# Altium PCB 2015PCB新.PcbDoc
Units mil, origin at the board's own origin, x right, y up, seen from the top; angles counter-clockwise.
Board outline 3610.89 x 3006.48 mil, 2 copper layers (Top Layer, Bottom Layer); 75 components, 41 nets, 243 pads, 76 vias.
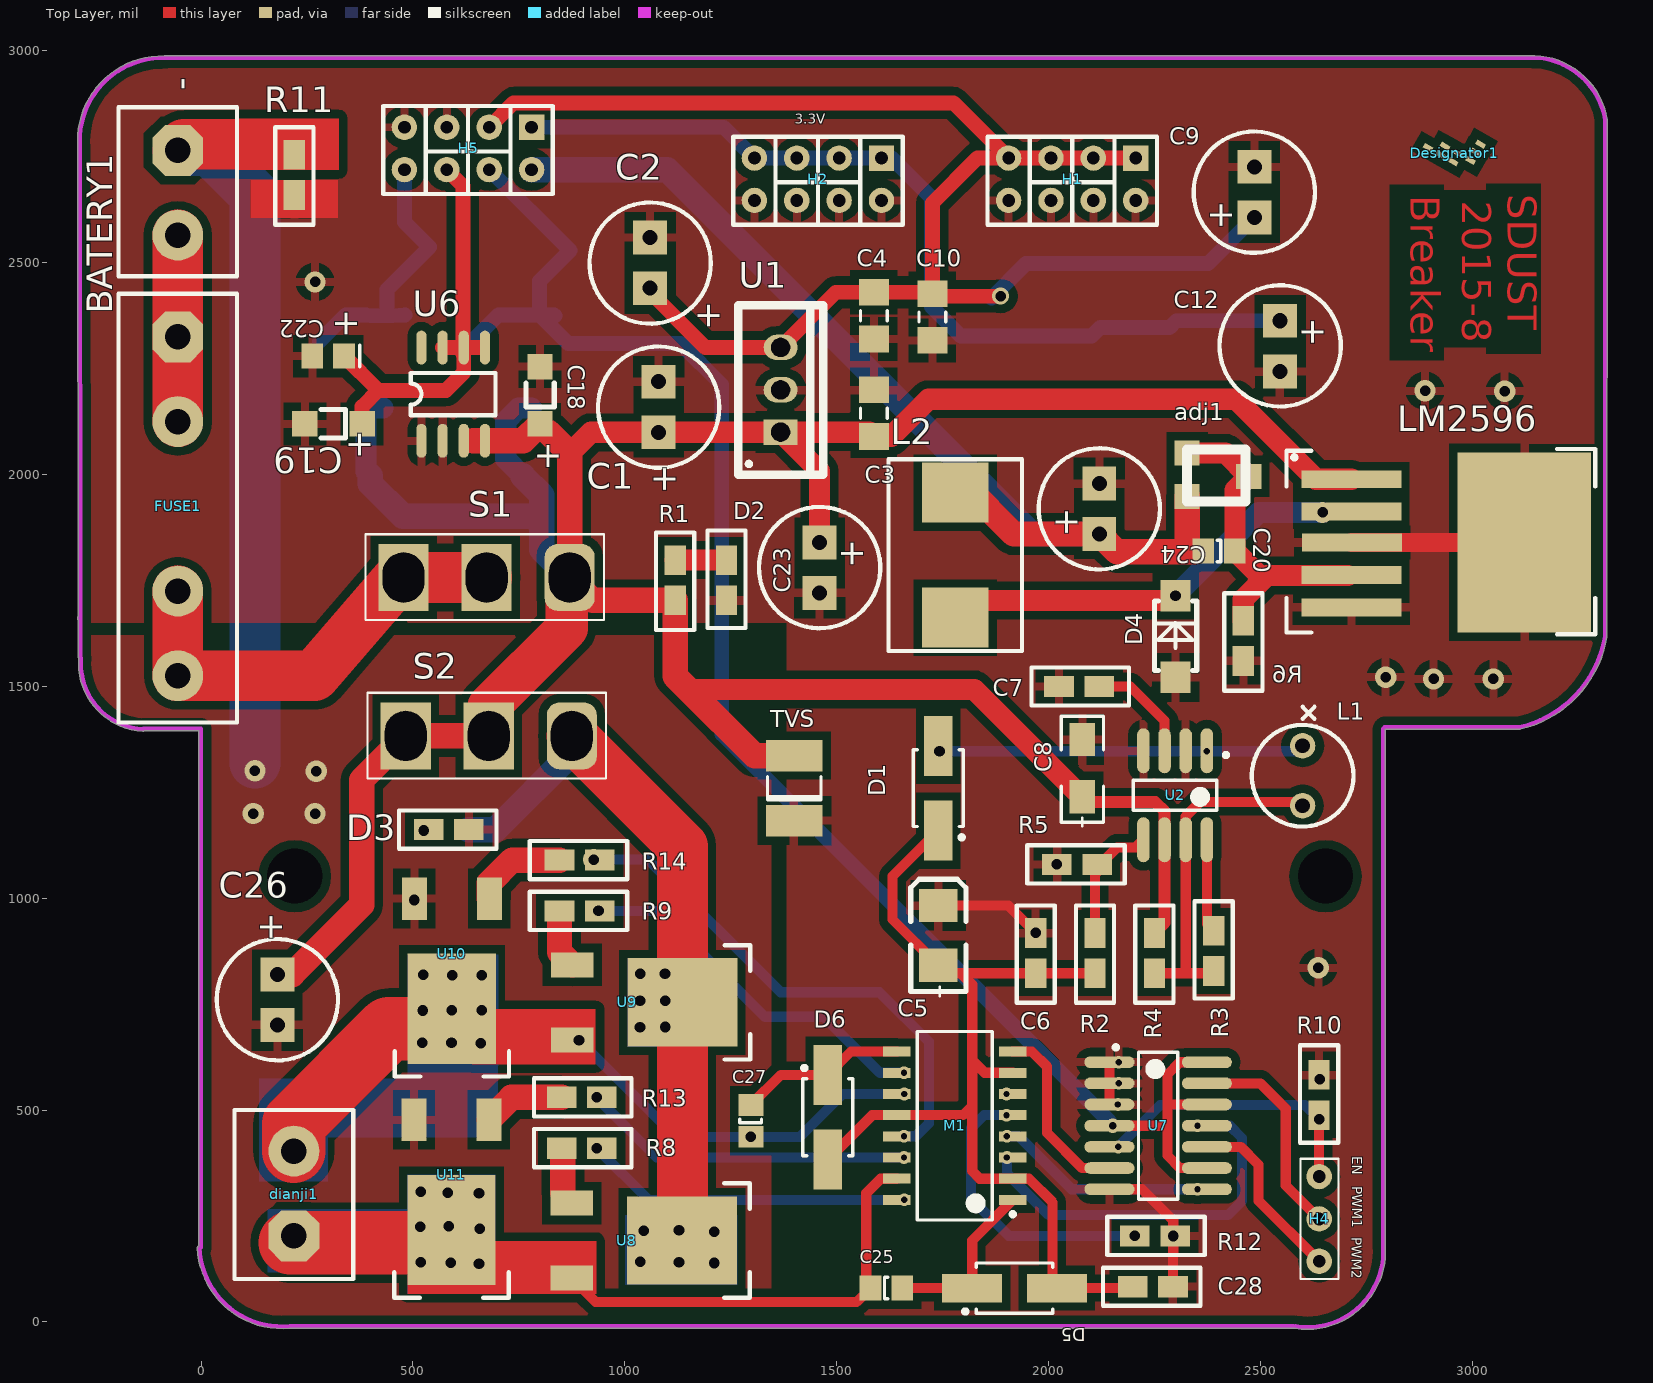
[diagram p0: Top Layer view]
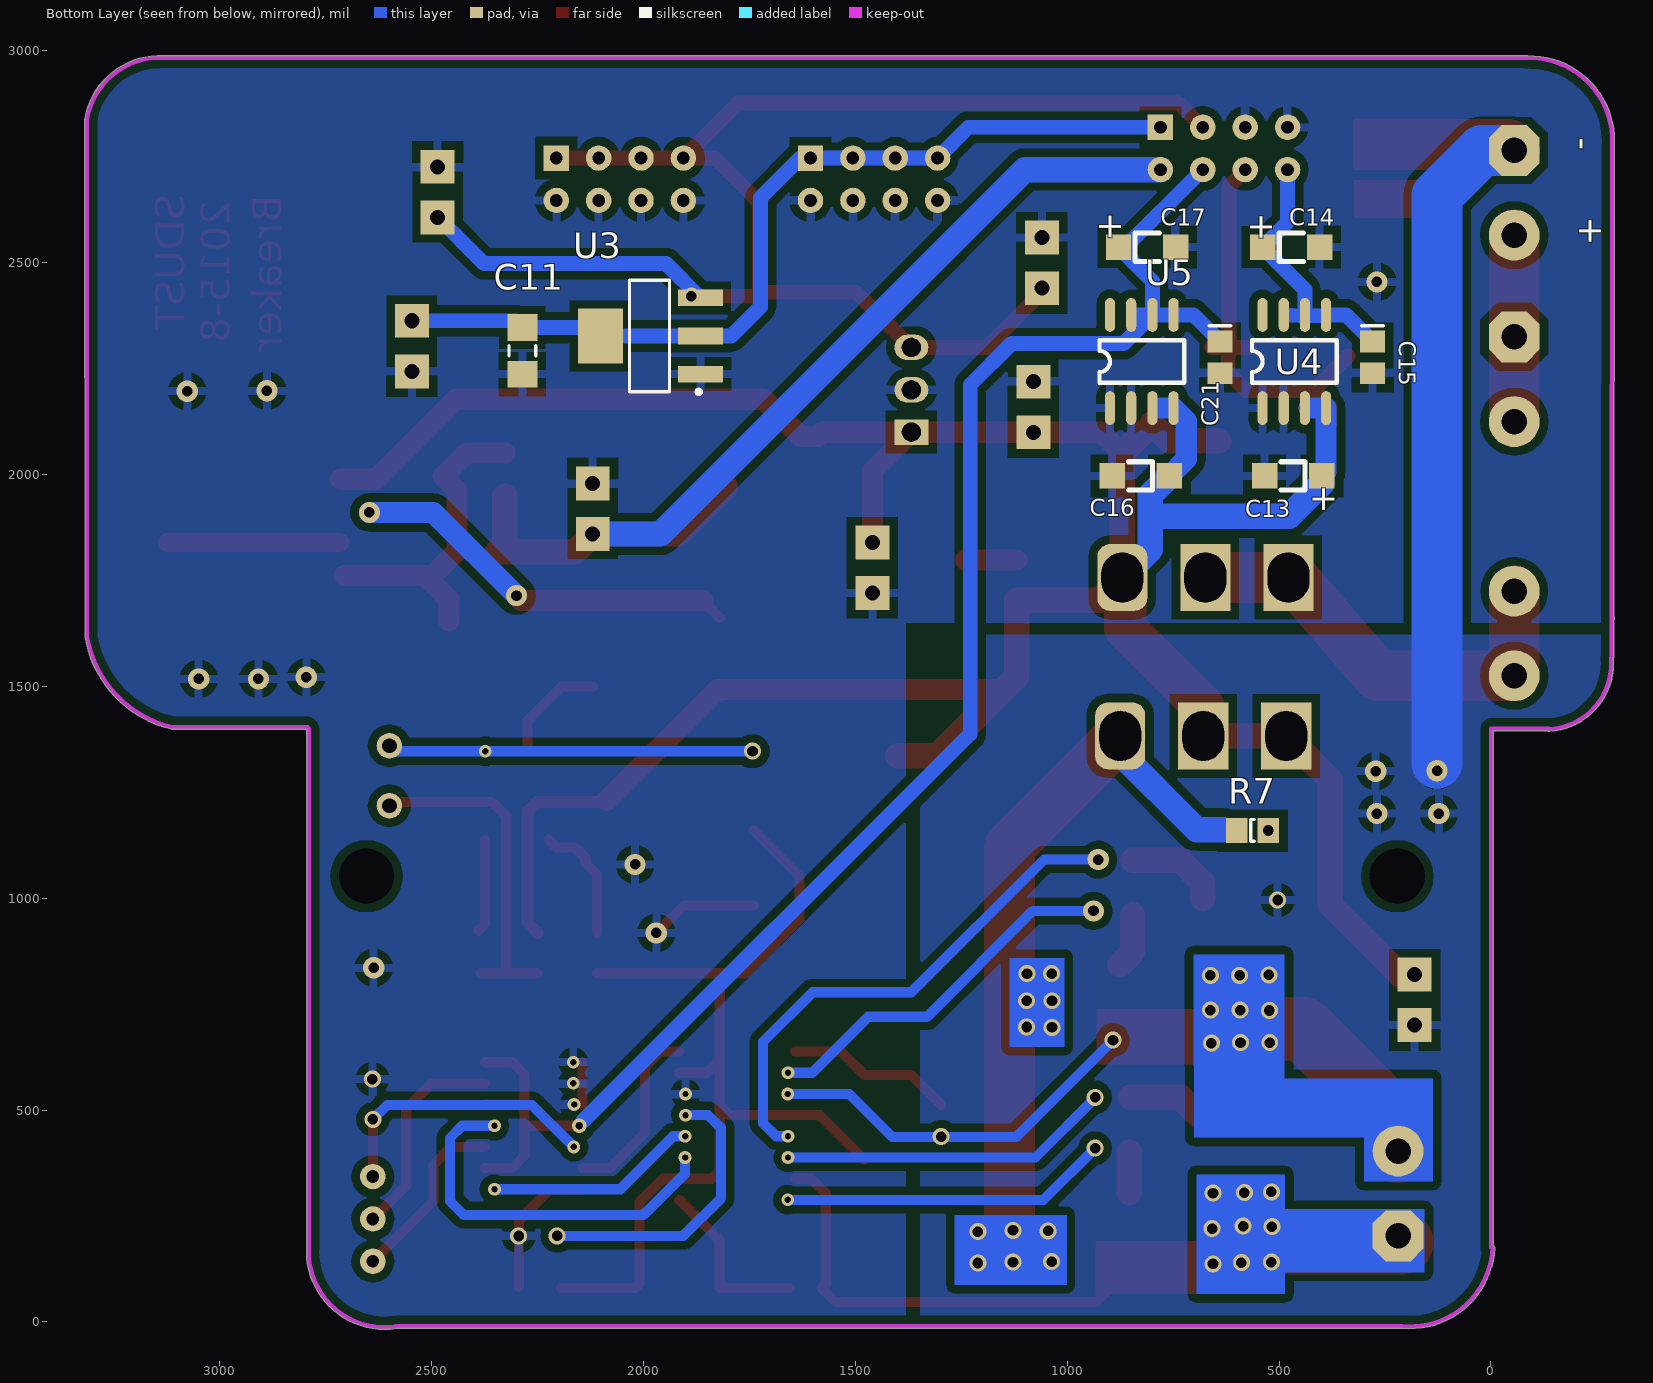
[diagram p1: Bottom Layer view, seen from below]

## Layer stack, top to bottom
Top Layer: signal copper 1.4
Dielectric: dielectric 12.6, FR-4, Dk 4.8
Bottom Layer: signal copper 1.4

## Board outline
-8.61,175.51 cw(c-3.6,175.7) -5.02,180.51 -5.02,1395.26 -134.79,1395.26 cw(c-137.63,1399.39) -137.91,1394.38 cw(c-129.04,1554.08) -288.54,1565.98 cw(c-284.67,1569.17) -289.69,1569.17 -289.69,1657.2 -290.22,1657.73 cw(c-286.67,1661.27) -289.69,1665.28 -290.68,2770.44 cw(c-91.06,2788.05) -86.84,2988.41 cw(c-84,2984.27) -84,2989.29 3132.9,2989.29 cw(c3140.03,2807.55) 3319.14,2839.16 cw(c3314.2,2838.28) 3319.22,2838.28 cw(c3314.2,2838.28) 3319.22,2838.19 3319.22,2838.28 3319.22,2838.19 3318.41,1617.91 cw(c3313.39,1617.85) 3318.41,1617.85 cw(c3313.39,1617.85) 3318.34,1617.01 cw(c3051.9,1662.28) 3112.12,1398.81 cw(c3111,1403.7) 3111,1398.69 2795.01,1398.69 2795.01,180.46 cw(c2611.54,166.79) 2795.52,166.79 cw(c2611.54,166.79) 2582.85,-14.94 cw(c2583.63,-9.99) 2580.87,-14.18 cw(c2579.08,-9.49) 2579.08,-14.51 209.73,-14.51 cw(c190,183.27)

## Design rules (kind name [scope] priority, off if disabled: settings)
Clearance Clearance_1 [InPoly] p1: gap=20
Clearance [All] p2: gap=10
ComponentClearance [All] p1: gap=8 collisioncheckmode=3 verticalgap=8 showdistances=FALSE
HoleSize [All] p1: absolutevalues=TRUE maxlimit=200 minlimit=0 maxpercent=80.000 minpercent=20.000
MinimumSolderMaskSliver [All] p1: minsoldermaskwidth=1
PolygonConnect [All] p1: connectstyle=Relief reliefconductorwidth=20 reliefentries=4 polygonreliefangle="90 Angle"
RoutingVias [All] p1: holewidth=25 width=40 viastyle="Through Hole" minholewidth=15 minwidth=25 maxholewidth=25 maxwidth=50
SilkToSilkClearance [All] p1: silktosilkclearance=0
SilkscreenOverComponentPads [All] p1: minsilkscreentomaskgap=0
SolderMaskExpansion [All] p1: expansion=4
TestPointUsage [All] p1: valid=0 allowmultiple=FALSE
Testpoint [All] p1: side=15 testpointundercomponent=TRUE minsize=40 maxsize=100 preferedsize=60 minholesize=0 maxholesize=40 preferedholesize=32 testpointgrid=1 style=1023 order=0123456789
Width [All] p1: maxlimit=1000 minlimit=8 preferedwidth=24
19 further rules are at their usual default settings.

## Components (designator, comment, footprint, x,y, rotation, side; value= is the part's Value field where it differs from the comment)
adj1 "RISISTR_ADJ" RISIATER_ADJ 2400,2000 r270 top
BATERY1 "7.2V电池" PCBComponent_1#1 -55,2765.27 r0 top
C1 "Cap Pol1_1" PCBComponent_1#2 1080,2100 r180 top
C2 "Cap Pol1_1" PCBComponent_1#2 1060,2440 r180 top
C3 "Cap" PCBComponent_1#3 1588,2200.27 r0 top
C4 "Cap" PCBComponent_1#3 1588,2320.27 r180 top
C5 "22uF_3528" 3528_B 1740,840 r90 top
C6 "0.1uF" 0805#1 1970,823.27 r90 top
C7 "470pF" 0805#1 2120,1500 r180 top
C8 "10uf" 1206#1 2080,1240 r90 top
C9 "Cap Pol1_1" PCBComponent_1#2 2486,2607.27 r180 top
C10 "Cap" PCBComponent_1#3 1726,2427.27 r0 top
C11 "Cap" PCBComponent_1#3 2286,2347.27 r180 bottom
C12 "Cap Pol1_1" PCBComponent_1#2 2547,2363.27 r0 top
C13 "10uF" 1206#2 399,1997 r0 bottom
C14 "10uF" 1206#2 539,2537 r180 bottom
C15 "104" c0805 279,2277 r270 bottom
C16 "10uF" 1206#2 759,1997 r0 bottom
C17 "10uF" 1206#2 879,2537 r180 bottom
C18 "10uF" 1206#2 800,2120 r90 top
C19 "10uF" 1206#2 380,2120 r180 top
C20 "104" 0805#2 2440,1820 r180 top
C21 "104" c0805 639,2277 r270 bottom
C22 "104" c0805 300,2280 r180 top
C23 "Cap Pol1_1" PCBComponent_1#2 1460,1840 r0 top (schematic designator C12)
C24 "Cap Pol1_1" PCBComponent_1#2 2120,1860 r180 top (schematic designator C12)
C25 "4.7uF" 0805#2 1580,80 r0 top
C26 "Cap Pol1_1" PCBComponent_1#2 180,820 r0 top
C27 "4.7uF" 0805#2 1297.69,437.58 r90 top
C28 "0.1uF" 0805#1 2199,83.27 r0 top
D1 "1N5819" SS14_SMA 1740,1260 r270 top
D2 "LED_0805" 0805#1 1240,1798.27 r270 top
D3 "LED_0805" 0805#1 537,1162.27 r0 top
D4 "1N5819" 1N5819 2300,1620 r0 top
D5 "1N5819" SS14_SMA 1920,80 r180 top
D6 "1N5819" SS14_SMA 1479,483.27 r90 top
Designator1 "Comment" FREESCALE 3020,2780 r270 top
dianji1 "dianji" PCBComponent_1#1 219,203.27 r180 top
FUSE1 "Header 2X2" PCBComponent_1#4 -55,2325.27 r0 top
H1 "HEADER4X2" HEADER4X2 2206,2747.27 r180 top
H2 "HEADER4X2" HEADER4X2 1606,2747.27 r180 top
H4 "HEADER" 干簧管 2639,143.27 r90 top
H5 "HEADER4X2" HEADER4X2 780,2820 r180 top (schematic designator H2)
L1 "Inductor" PCBComponent_1#5 2600,1360 r270 top
L2 "L?" 7*7*4 1780,1820 r90 top
LM2596 "Comment" LM2596 2920,1840 r0 top
M1 "HIP4082" SO-16 1779,463.27 r90 top
R1 "RES" 0805#1 1119,1703.27 r90 top
R2 "10K" 0805#1 2110,823.27 r90 top
R3 "180" 0805#1 2390,923.27 r270 top
R4 "0.22" 0805#1 2250,823.27 r90 top
R5 "1K" 0805#1 2020,1080 r0 top
R6 "Res2" 0805#1 2460,1560 r90 top
R7 "RES" 0805#2 600,1160 r180 bottom
R8 "10" 0805#1 946,410.27 r180 top
R9 "10" 0805#1 846,970.27 r0 top
R10 "10K" 0805#1 2639,583.27 r270 top
R11 "RES" 0805#1 220,2660 r90 top
R12 "10K" 0805#1 2299,203.27 r180 top
R13 "10" 0805#1 946,530.27 r180 top
R14 "10" 0805#1 846,1090.27 r0 top
S1 "单刀双掷开关" 三脚开关 674,1757.27 r0 top
S2 "单刀双掷开关" 三脚开关 679,1383.27 r0 top
TVS "TVS" 1812 1400,1260 r90 top (schematic designator erjiguan1)
U1 "LM2940" PCBComponent_1#6 1368,2100.27 r0 top
U2 "MC34063_sop" SOP-8 2299,1243.27 r270 top
U3 "AMS1117" SOT223_forAMS1117 1986,2327.27 r0 bottom
U4 "TPS7350" SO-8 539,2157 r90 bottom
U5 "TPS7350" SO-8 899,2157 r90 bottom
U6 "TPS7333" SO-8 520,2080 r90 top
U7 "74HC08D_sop" SOP-14 2259,463.27 r0 top
U8 "LR7843" DPAK 1135,192.27 r270 top
U9 "LR7843" DPAK 1136,754.27 r270 top
U10 "LR7843" DPAK 592,739.27 r180 top
U11 "LR7843" DPAK 591,217.27 r180 top

## Footprints (in the part's own frame and the unit in brackets; to place one, negate y for a bottom-side part, rotate by r counter-clockwise, add the part's x,y. Pads: shape width x height; smd on the part's side, far side on the other; paste and mask are expansions set on the pad)
1N5819 [mm]
  rect 1.8x1.9 smd: 1(0,-2.5) 2(0,2.4)
  silkscreen extent -1.27,-2.09 1.27,2.07
7*7*4 [mm]
  rect 3.6x4 smd: 1(-4,0) 2(3.5,0)
  silkscreen extent -6,-4 5.5,4
0805#1 [mil]
  rect 70x50 smd: 1(0,0) 2(95,0)
  silkscreen extent -70,-45 160,45
0805#2 [mil]
  rect 51.18x59.05 smd: 1(0,0) 2(74.8,0)
  silkscreen extent 33,-25 41,26
1206#1 [mil]
  rect 78.74x60 smd: 1(0,0) 2(135,0)
  silkscreen extent -70,-50 190,50
1206#2 [mil]
  rect 60x60 smd: 1(0,0) 2(135,0)
  silkscreen extent 39,-33 96,33
1812 [mm] "Chip Capacitor; Body 4.5 x 3.2 mm (LxW typ)"
  rect 1.9x3.4 smd: 1(-1.95,0) 2(1.95,0)
  silkscreen extent -0.7,-1.6 0.7,1.6
3528_B [mil]
  rect 78.74x90 smd: 1(2,0) 2(143,0)
  silkscreen extent -71,-65 205,65
c0805 [mm] "Chip Capacitor; Body 2.0 x 1.2 mm (LxW typ)"
  rect 1.3x1.5 smd: 1(-0.95,0) 2(0.95,0)
  silkscreen extent -1.9,-0.65 -1.9,0.65
DPAK [mil]
  rect 59.06x100 smd: 1(-88.5,-260) 3(88.5,-260)
  rect 208.66x260 smd: 2(0,0)
  silkscreen extent -135,100 135,160
FREESCALE [mm]
  rect 0.6x0.3 smd rot 60: 0(0,0) 1(0.475,-0.3) 2(0.975,-0.6) 3(0.55,-1.35) 4(1.05,-1.65) 5(0.125,-2.125) 6(0.625,-2.4) 7(0.2,-3.15)
HEADER4X2 [mil]
  rect 60x60 hole 30: 1(0,0)
  round 60 hole 30: 2(100,0) 3(200,0) 4(300,0) 5(300,100) 6(200,100) 7(100,100) 8(0,100)
  silkscreen extent -50,-50 350,157
LM2596 [mm]
  rect 8x10.8 smd: 0(5.168,0)
  rect 6x1.07 smd: 1(-5.2,3.792) 2(-5.2,1.846) 3(-5.168,0) 4(-5.2,-1.946) 5(-5.2,-3.892)
  silkscreen extent -9.1,-5.5 9.41,5.6, body extent -4.69,-5.21 4.2,5.21, height 4.65
PCBComponent_1#1 [mil]
  oct 120x120 hole 60: 1(0,0)
  round 120 hole 60: 2(0,-200)
  silkscreen extent -140,-297 140,102
PCBComponent_1#2 [mil]
  rect 80x80 hole 35.42: 1(0,0) 2(0,-119.37)
  silkscreen extent -143,-203 143,84
PCBComponent_1#3 [mil]
  rect 70.87x62.99 smd: 1(0,0) 2(0,-110.24)
  silkscreen extent -31,-67 31,-43
PCBComponent_1#4 [mil]
  oct 120x120 hole 60: 1(0,0)
  round 120 hole 60: 2(0,-600) 3(0,-200) 4(0,-800)
  silkscreen extent -140,-910 140,102
PCBComponent_1#5 [mil]
  round 60 hole 35: 1(0,0) 2(141.42,0)
  silkscreen extent -92,-120 191,120
PCBComponent_1#6 [mil]
  rect 80x60 hole 45: 1(0,0)
  oval 80x60 hole 45: 2(0,100) 3(0,200)
  silkscreen extent -100,-100 100,300
RISIATER_ADJ [mm]
  rect 1.5x1.5 smd: 1(-1.3,-1.85) 2(0.1,1.85) 3(1.3,-1.85)
  silkscreen extent -1.5,-1.85 1.6,1.65
SO-8 [mil]
  oval 80x24 smd: 1(0,0) 2(0,-50) 3(0,-100) 4(0,-150) 5(220,-150) 6(220,-100) 7(220,-50) 8(220,0)
  silkscreen extent 60,-175 160,25
SO-16 [mm] "Small Outline; 16 Leads; Body Width 5.6 mm; Pitch 1.27 mm"
  rect 0.6x1.65 smd: 1(-4.445,-3.475) 2(-3.175,-3.475) 3(-1.905,-3.475) 4(-0.635,-3.475) 5(0.635,-3.475) 6(1.905,-3.475) 7(3.175,-3.475) 8(4.445,-3.475) 9(4.445,3.475) 10(3.175,3.475) 11(1.905,3.475) 12(0.635,3.475) 13(-0.635,3.475) 14(-1.905,3.475) 15(-3.175,3.475) 16(-4.445,3.475)
  silkscreen extent -5.65,-3.6 5.65,2.25
SOP-8 [mm] "SOIC, 8-Leads, Body 5.0x4.0mm (max), Pitch 1.27mm, IPC Medium Density"
  oval 2.7x0.75 smd: 1(-2.667,1.905) 2(-2.667,0.635) 3(-2.667,-0.635) 4(-2.667,-1.905) 5(2.667,-1.905) 6(2.667,-0.635) 7(2.667,0.635) 8(2.667,1.905)
  silkscreen extent -2.54,-2.5 0.9,3.17, body extent -2,-2.5 2,2.5, height 1.75
SOP-14 [mm] "SOIC, 14-Leads, Body 8.8x4.0mm (max), Pitch 1.27mm, IPC Medium Density"
  oval 3x0.7 smd: 1(-2.921,3.81) 2(-2.921,2.54) 3(-2.921,1.27) 4(-2.921,0) 5(-2.921,-1.27) 6(-2.921,-2.54) 7(-2.921,-3.81) 8(2.921,-3.81) 9(2.921,-2.54) 10(2.921,-1.27) 11(2.921,0) 12(2.921,1.27) 13(2.921,2.54) 14(2.921,3.81)
  silkscreen extent -2.66,-4.4 1.18,4.82, body extent -2,-4.38 2,4.38, height 1.75
SOT223_forAMS1117 [mm] "SOT223, 4-Leads, Body 6.7x7.3mm (max), Pitch 2.30mm, IPC Low Density"
  rect 2.7x1 smd: 1(-3.048,2.286) 2(-3.048,0) 3(-3.048,-2.286)
  rect 2.7x3.3 smd: 2(2.95,0)
  silkscreen extent -3.07,-3.35 1.2,3.47, body extent -1.85,-3.35 1.85,3.35, height 1.8
SS14_SMA [mm] "Molded Diode, 2-Leads, Body 4.3x2.6mm, IPC Low Density"
  rect 3.6x1.7 smd: 1(-2.54,0) 2(2.54,0)
  silkscreen extent -2.3,-1.5 3.07,1.53, body extent -2.29,-1.5 2.28,1.5, height 2.62
三脚开关 [mm]
  rect 3x4 hole 2.5 slot 3 at 90 deg: 1(-4.978,0) 2(0,0)
  rrect50% 3x4 hole 2.5 slot 3 at 90 deg: 3(4.978,0)
  silkscreen extent -7.26,-2.54 7.04,2.59
干簧管 [mil]
  round 60 hole 30: 1(0,0) 2(100,0) 3(200,0)
  silkscreen extent -42,-46 242,44

## Part data
BATERY1 dianji1: library part "Header 2", "Header, 2-Pin"
C1 C2 C9 C12 C23 C24 C26: "Polarized Capacitor (Radial)"
C3 C4 C10 C11: "Capacitor"
C5: library part 10uF_3528
C6 C7 C25 C27 C28: library part 0.1uF_0805
C8: library part ELECTRO2_2, "Electrolytic Capacitor"
C13 C14 C17 C18 C19 C22: library part "Cap Pol1_1", "Polarized Capacitor (Radial)"
C15 C16 C20 C21: library part Cap, "Capacitor"
D1 D4 D5 D6: library part 1N5819_SMA
FUSE1: "Header, 2-Pin, Dual row"
H4: library part HEADER3
L2: library part 33Uinductor774
R1 R6 R7 R11: library part 0805-电阻
R2 R3 R4 R5 R8 R9 R10 R12 R13 R14: library part RES_0805
S2: library part 三脚开关
TVS: library part Component_1
U5: library part 0512
U6: library part LM2940
U7: library part 74HCT00D_sop
U8 U9 U10 U11: library part IRF3205_D2PAK

## Free pads (board coordinates)
  round 60 hole 129.92: 1(221,1052.27) 2(2654,1052.27)

## Via types
v1: diameter 40, hole 25, Top Layer to Bottom Layer, 42 vias
v2: diameter 50, hole 25, Top Layer to Bottom Layer, 17 vias
v3: diameter 30, hole 15, Top Layer to Bottom Layer, 16 vias
v4: diameter 35, hole 18, Top Layer to Bottom Layer, 1 vias

## Nets (pads, with @x,y where several pads share a name; then routed paths per layer and width w, separated by ;. In a path a pad name is that pad's centre, name@x,y a point inside that pad or via, vN(x,y) a via of type N, cw(c..) or ccw(c..) an arc to the next point about the centre after c; other vN are vias at no path point)
3.3V: C11.1 C12.1 H2.1 H2.2 H2.3 H2.4 H5.1 U3.2 | length 2170.6
  Bottom Layer w35: H5.1 1233.27,2820 H2.4 H2.3 H2.2 H2.1 1630,2747.27 1724,2653.27 1724,2396.27 1793,2327.27 U3.2@1866,2327.27 ; U3.2@1832,2327.27 U3.2@1866,2327.27 ; C12.1 2302,2363.27 C11.1 2122.14,2347.27 2102.14,2327.27 U3.2@1866,2327.27
3.3V(D): C19.1 C22.1 H5.6 U6.5 U6.6 U6.7 | length 1044.2
  Top Layer w35: C22.1 418.4,2199 ; C19.1 380,2160.6 418.4,2199 ; U6.7 U6.6@618,2300 ; H5.6@590,2710 H5.6 618,2682 618,2302 U6.6 ; U6.6@618,2284 U6.6@618,2300 ; U6.5@660,2300 U6.6 ; 418.4,2199 578,2199 620,2241 U6.6 ; U6.6@618,2300 U6.6
5V(3): C2.1 C4.2 C9.1 C10.1 H1.1 H1.2 H1.3 H1.4 H5.2 U1.3 U3.3 | length 3692.6
  Top Layer w35: H5.2 737.5,2877.5 1775.77,2877.5 H1.4 ; C2.1@1047,2443.27 1190,2300.27 U1.3 1498.24,2430.51 C4.2 C10.1@1722.76,2430.51 ; v1(1887,2421.27) 1732,2421.27 C10.1 1726,2641 1832.27,2747.27 H1.4 ; H1.1 H1.2 H1.3 H1.4
  Bottom Layer w35: U3.3 1947,2498.27 2377,2498.27 C9.1
5V(B): C17.1 C21.1 H5.7 U5.5 U5.6 U5.7 U7.4 U7.9 U7.12 U7.14 | length 3903.7
  Top Layer w24: v4(2152,463.27) 2281,463.27 ; 2282.73,513.27 U7.12 ; U7.9 2310.73,363.27 2281,393 2281,463.27 ; U7.14 2310,613.27 2281,584.27 2281,463.27
  Bottom Layer w35: C21.1 701.6,2377 U5.5@740,2377 ; H5.7 871,2529 799,2457 U5.6 ; U5.5 U5.6 ; 835,2375 833,2377 U5.6 ; v4@2144,473.17 1229,1388.17 1229,2212 1131.5,2309.5 866.5,2309.5 U5.6
5V(S): C14.1 C15.1 H5.5 U4.5 U4.6 U4.7 | length 680
  Bottom Layer w35: C15.1 341.6,2377 U4.5 ; 401,2375 451,2375 U4.7@481,2377 ; U4.6 439,2437 C14.1 ; H5.5 480,2596 C14.1 ; 500,2576 C14.1
7.2V: C1.1 C3.2 C8.1 C13.1 C16.1 C18.1 C23.1 C26.1 LM2596.1 R1.1 R4.2 S1.3 S2.1 S2.2 TVS.2 U1.1 U2.6 U4.3 U4.4 U5.3 U5.4 U6.3 U6.4 | length 7678.8
  Top Layer w28: C8.1@2086.77,1231.23 2093,1227 2252.27,1227 2274,1205.27 U2.6 2274,942.27 R4.2
  Top Layer w35: C3.2@1577.76,2100.27 C3.2
  Top Layer w50: C18.1 C18.1@820,2100 ; 870,2050 920,2100 C1.1 ; C1.1@1068,2100.27 U1.1 ; 1150.82,1492.41 1151.4,1493 1825,1493 C8.1@2086.77,1231.23 ; C23.1 1460,2008.27 U1.1 ; C3.2@1577.76,2100.27 U1.1 ; C3.2 1629.04,2090.04 1717,2178 2443,2178 2631.71,1989.29 LM2596.1
  Top Layer w60: C26.1 214.73,820 379,984.27 379,1279.27 S2.1 S2.2 ; 642,2080 U6.4 ; 686,2080 760,2080 C18.1 ; C18.1@820,2100 870,2050 S1.3 ; S1.3@898,1729.27 924,1703.27 R1.1@1111,1703.27 ; R1.1 1119,1524.23 1150.82,1492.41 1306.46,1336.77 TVS.2
  Top Layer w100: S2.2 679,1453.27 863,1637.27 S1.3@863,1762
  Bottom Layer w50: C13.1 389,2007 389,2103 U4.4 U4.3@429,2157 ; C16.1 719,2037 719,2127 U5.4 779.63,2157
  Bottom Layer w60: C13.1 399,1979 475.91,1902.09 783.91,1902.09 804,1882 ; C16.1 804,1952 804,1882 ; S1.3 804,1823.27 804,1882
12V: C5.1 C6.1 C28.1 D1.2 D5.1 D6.1 M1.2 M1.7 M1.12 R2.1 | length 2361.9
  Top Layer w24: D6.1 1584,488.27 M1.12 1798.27,488.27 1820,510 ; D1.2 1632,1052 1632,950 C5.1 1758.73,823.27 1792.73,823.27 ; 1820,356.27 1838,338.27 M1.2 1954,338.27 2009.96,282.31 2009.96,90.04 D5.1 C28.1@2195.73,80 ; 1820,362.27 1820,510 ; M1.7 1849.73,588.27 1820,618 ; R2.1 C6.1 1792.73,823.27 ; 1792.73,823.27 1820,796 1820,618 ; 1820,510 1820,618
ADJ: adj1.3 C20.2 C24.1 H5.8 L2.2 | length 2427.4
  Top Layer w60: L2.2@1807.15,1970.64 1917.8,1860 C24.1 2162.11,1817.89 2327.17,1817.89 ; adj1.3 2327.17,1817.89 ; C20.2@2344.09,1817.89 2327.17,1817.89
  Bottom Layer w60: H5.8 1100,2720 1960,1860 C24.1
EN: H4.3 R10.2 U7.5 | length 674.1
  Top Layer w24: H4.3 R10.2
  Bottom Layer w24: v3(2165,413.27) 2264,512.27 2605,512.27 v1(2639,478.27)
ENABLE: M1.8 U7.6 | length 433.5
  Top Layer w24: M1.8 1961,638.27 1997,602.27 1997,446.27 2080,363.27 U7.6
GND: C1.2 C2.2 C3.1 C4.1 C5.2 C6.2 C7.2 C8.2 C9.2 C10.2 C11.2 C12.2 C13.2 C14.2 C15.2 C16.2 C17.2 C18.2 C19.2 C21.2 C22.2 C23.2 C24.2 C28.2 D2.2 D4.1 H1.5 H1.6 H1.7 H1.8 H2.5 H2.6 H2.7 H2.8 H5.3 H5.4 LM2596.0 LM2596.3 LM2596.5 M1.6 R5.1 R6.1 R10.1 R11.1 R12.1 TVS.1 U1.2 U2.2 U2.4 U3.1 U4.1 U4.2 U5.1 U5.2 U6.1 U6.2 U7.1 U7.2 U7.3 U7.7 | length 1100.9
  Top Layer w24: C5.2 1905.27,983 v2(1970,918.27) ; U7.7 2220.9,313.27 2294,240.17 2294,198.27 C28.2 ; U7.3 U7.2 U7.1
  Top Layer w45: LM2596.3 LM2596.0
  other v1: 2295,203 2640,573.27
  other v2: 2637,836 2020,1080 2909,1518 3050,1518 2796,1522 3077,2197 2889,2198 269,2455
  other v3: 2164,513.27 1901,538.27 2166,563.27 2166,613.27
Netadj1_1: adj1.1 adj1.2 C20.1 LM2596.4 R6.2 | length 773.7
  Top Layer w50: adj1.1 2417.71,2051.18 adj1.2 2440,1963.23 C20.1 2506.61,1753.39 ; R6.2 2460,1706.77 2515.23,1762 LM2596.4@2706.66,1762
NetBATERY1_2: BATERY1.2 FUSE1.1 FUSE1.3 | length 440
  Top Layer w120: FUSE1.3 FUSE1.1 BATERY1.2
NetC7_1: C7.1 U2.3 | length 258.3
  Top Layer w24: C7.1 2193,1500 2274,1419 U2.3
NetC25_1: C25.1 dianji1.1 M1.15 U8.3 U11.2 | length 1448.9
  Top Layer w24: U8.3 931.5,47.27 1547.27,47.27 C25.1 1570,90 1570,304 1604.27,338.27 M1.15
  Top Layer w100: U11.2@561,187.27 U11.2
  Top Layer w150: dianji1.1@211,187.27 U11.2@561,187.27
  other v1: 656,137.27 589,140.27 518,141.27 658,220.27 517,225.27 585,226.27 656,304.27 582,305.27 518,307.27
NetC25_2: C25.2 D5.2 M1.1 | length 413.2
  Top Layer w24: C25.2 D5.2 1820,192.46 M1.1
NetC27_1: C27.1 dianji1.2 M1.11 U9.3 U10.2 | length 1769.8
  Top Layer w24: U10.2@545,692.27 U10.2 U10.2@665.5,665.77
  Top Layer w70: U10.2@665.5,665.77 U9.3
  Top Layer w150: dianji1.2 219,468.27 443,692.27 U10.2@545,692.27
  Bottom Layer w24: v1(892,665.27) 1121,436.27 1412.31,436.27 1514.31,538.27 v3(1660,538.27)
  other v1: 1297.69,437.58 660,658.27 522,659.27 591,659.27 523,735.27 592,736.27 662,736.27 593,818.27 662,818.27 524,819.27
NetC27_2: C27.2 D6.2 M1.9 | length 396.6
  Top Layer w24: C27.2 1368.58,583.27 D6.2 1534,638.27 M1.9
NetD1_1: D1.1 L1.1 U2.1 | length 862.4
  Bottom Layer w24: v1(1742.9,1347.23) v3(2374,1347.23) 2587.23,1347.23 L1.1
NetD2_1: D2.1 R1.2 | length 121
  Top Layer w50: R1.2 D2.1
NetD3_1: D3.1 R7.2
  other v1: 525.2,1160
NetD4_2: D4.2 L2.1 LM2596.2 | length 929.9
  Top Layer w24: L2.1@1820,1662.52 1860.48,1703 ; D4.2@2288.51,1703 v2(2300,1714.49)
  Top Layer w50: 1860.48,1703 D4.2@2288.51,1703
  Bottom Layer w50: v2(2300,1714.49) 2496.51,1911 v2(2647,1911)
NetFUSE1_2: FUSE1.2 FUSE1.4 S1.1 S1.2 | length 1046.3
  Top Layer w120: FUSE1.2 FUSE1.4 267,1525.27 S1.1@467,1757.27 ; S1.1 S1.1@467,1757.27 ; S1.2 S1.1@467,1757.27
NetL1_2: L1.2 R3.2 R4.1 U2.7 | length 799.8
  Top Layer w24: R4.1 2321,823.27 ; R3.2@2385,823.27 2321,823.27 ; L1.2 2591.58,1227 2357.53,1227 2324,1193.47 U2.7 2324,826.27 2321,823.27
NetM1_5: M1.5 R12.2 | length 685.7
  Bottom Layer w24: v3(1901,488.27) 1848,488.27 1817,457.27 1817,292.27 1906,203.27 v1(2204,203.27)
NetM1_10: M1.10 R9.2 | length 880.6
  Top Layer w20: M1.10@1641.19,589.27 M1.10
  Bottom Layer w24: v2(938,970.27) 1081,970.27 1330.72,720.56 1469.77,720.56 1602.06,588.27 v3(1659,588.27)
NetM1_13: M1.13 R14.2 | length 1233
  Bottom Layer w24: v2(927,1091.27) 1055,1091.27 1368,778.27 1601,778.27 1718,661.27 1718,469.27 1687,438.27 v3(1659,438.27)
NetM1_14: M1.14 R13.1 | length 784.6
  Bottom Layer w24: v1(934.13,530.14) 933.63,529.64 1075,388.27 v3(1659,388.27)
NetM1_16: M1.16 R8.1 | length 776.5
  Bottom Layer w24: v1(934,410.27) 1056,288.27 v3(1660,288.27)
NetR2_2: R2.2 R5.2 U2.5 | length 292.8
  Top Layer w24: R2.2 2110,1057 2136.27,1083.27 2136.27,1094.27 2162.32,1120.32 2206.05,1120.32 U2.5
NetR3_1: R3.1 U2.8 | length 221.6
  Top Layer w24: U2.8 2374,939.27 R3.1
NetR7_1: R7.1 S2.3 U8.2 U9.2 | length 1658
  Top Layer w120: S2.3 1136,1122.27 U9.2 1136,193.27 U8.2
  Bottom Layer w60: 632,1162.27 694.79,1162.27 875,1342.48 S2.3
  other v1: 1211,139.27 1128,141.27 1037,142.27 1211,213.27 1045,215.27 1128,216.27 1036,695.27 1096,696.27 1036,758.27 1096,758.27 1037,822.27 1095,822.27
NetR8_2: R8.2 U8.1 | length 96.5
  Top Layer w60: U8.1@854,304.77 R8.2@854,401.27
NetR9_1: R9.1 U9.1 | length 130.9
  Top Layer w60: R9.1@846,961.27 846,872.77 U9.1
NetR13_2: R13.2 U11.1 | length 193.5
  Top Layer w60: U11.1 732.5,530.27 R13.2
NetR14_1: R14.1 U10.1 | length 225.2
  Top Layer w60: U10.1 680.5,1036.77 734,1090.27 R14.1
PGND: BATERY1.1 C26.2 D3.2 R11.2 U10.3 U11.3 | length 1794.3
  Top Layer w120: BATERY1.1 -40.27,2780 167,2780
  Bottom Layer w120: BATERY1.1 21,2765.27 127,2659.27 v2@127,1319
  other v1: 503.5,996
  other v2: 123,1200 269,1200 272,1300 127,1301
PWM1: H4.2 U7.13 | length 503.6
  Top Layer w24: U7.13 2500,563.27 2560,503.27 2560,322.27 H4.2
PWM2: H4.1 U7.10 | length 426.6
  Top Layer w24: U7.10 2454,413.27 2496,371.27 2496,286.27 H4.1
PWMIN1: M1.3 U7.11 | length 912.7
  Bottom Layer w24: v3(1902,388.27) 1902,351.27 2001,252.27 2424,252.27 2457,285.27 2457,434.27 2428,463.27 v3(2352,463.27)
PWMIN2: M1.4 U7.8 | length 501.8
  Bottom Layer w24: v3(1902,438.27) 1930,438.27 2055,313.27 v3(2352,313.27)
pads on no net: Designator1.0 Designator1.1 Designator1.2 Designator1.3 Designator1.4 Designator1.5 Designator1.6 Designator1.7 U4.8 U5.8 U6.8

## Polygon pours and split planes (outlines as drawn)
GND on Top Layer "Bottom Layer-No Net" (hatched 90Degree grid 20 track 8, remove dead copper, pour order 1002): 4929,1558.38 4936.87,1550.5 5094,1550.5 5094,1242.27 5093,1241.27 5091,1243.27 4938,1243.27 4938,1265.27 4918,1285.27 4929,1296.27 4929,1558.38
PGND on Top Layer "Top Layer-No Net" (solid, remove dead copper, pour order 1000): -284.67,1624 -284.67,1500.27 ccw(c-184.67,1500.27) -184.67,1400.27 0,1400.27 0,128 0,107 ccw(c100,107) 100,7 1349,7 1346,10 1346,1621 -280.67,1621 -284.67,1625
GND on Top Layer "Top Layer-No Net 1" (solid, remove dead copper, pour order 1000): -284.67,2981 -275.67,2990 3258,2990 3258,2957.2 3314.2,2901 3313.39,2900.19 3313.39,1489 3276,1489 3196,1409 3190.7,1403.7 2793.43,1403.7 2793.43,0.43 2790,-3 2783.51,-9.49 1382,-9.49 1382,1652 1386,1656 1381,1651 -284.67,1651 -284.67,2980.6 -281,2984.27 -99,2984.27
PGND on Bottom Layer "Top Layer-No Net 1" (solid, remove dead copper, pour order 1001): -284.67,1622 1347,1622 1347,-9.49 2.49,-9.49 0,-7 0,1400.27 -277.4,1400.27 -284.67,1393 -284.67,1622
GND on Bottom Layer "Top Layer-No Net 1" (solid, remove dead copper, pour order 1002): -290,2984.27 3304.27,2984.27 3307,2987 3313.39,2980.61 3313.39,1405 2794.73,1405 2793.43,1403.7 2790,1400.27 2790,-9 1384.49,-9 1384,-9.49 1381,-6.49 1381,1651 -281.67,1651 -284.67,1648 -286,1649.33 -286,2984.27

## Keep-outs
Keep-Out Layer:
  lines w10: -286.67,1661.27 -284.67,1659.27 ; -284.67,1569.17 -284.67,1611.94 -284.67,1659.27 ; -283.36,1567.86 ccw(c-129.04,1554.08) -137.63,1399.39 ; -136.75,1400.27 -78.18,1400.27 0,1400.27 0,175.7 ; -84,2984.27 3133,2984.27 cw(c3140.03,2807.55) 3314.2,2838.28 3313.39,1617.85 cw(c3051.9,1662.28) 3111,1403.7 2793.43,1403.7 ; -83,2983.27 ccw(c-91.06,2788.05) -285.67,2770.65 -284.67,1659.27 ; -3.6,175.7 ccw(c190,183.27) 209.47,-9.49 2579.08,-9.49 ; 2583.63,-9.99 ccw(c2611.54,166.79) 2790,180.27 ; 2790,173.27 2790,1400.27

## Other copper
Top Layer:
  rectangle net GND: 117,2606 323,2696
  rectangle net PGND: 85,2719 325,2841
  rectangle net NetC27_1: 639,608.27 931,738.27
  rectangle net NetC25_1: 487,66.27 933,191.27
  text "SDUST" at 3060,2661.27 h118.11 r270
  text "Breaker" at 2832,2659.27 h118.11 r270
  text "2015-8" at 2953,2647 h118.11 r270
Bottom Layer:
  rectangle net NetR7_1: 1006,649.27 1136,859.27
  rectangle net NetR7_1: 1001,87.27 1266,252.27
  rectangle net NetC25_1: 157,117.27 695,266.27
  rectangle net NetC25_1: 486,66.27 695,348.27
  rectangle net NetC27_1: 138,435.27 701,575.27
  rectangle net NetC27_1: 487,466.27 701,628.27
  rectangle net NetC27_1: 137,331.27 300,575.27
  rectangle net NetC27_1: 487,604.27 702,867.27

## Silkscreen, mask and mechanical layers (free items; w line width, h text height)
Top Overlay:
  text "-" at -20,2907.27 h60 r90
  text "3.3V" at 1401,2820.27 h40
  text "EN" at 2709,391.27 h40 r270
  text "PWM1" at 2709,320.27 h40 r270
  text "PWM2" at 2708,200.27 h40 r270
Bottom Overlay:
  text "-" at -191,2765.27 h60 r90
  text "+" at -208,2540.27 h60 r90

## Dimensions
-284.67,1659.27 to 3314.2,2838.28 on Top Overlay
-78.18,1400.27 to 209.47,-9.49 on Top Overlay
3313.39,1617.85 to 2790,1400.27 on Top Overlay
-284.67,1569.17 to 0,1400.27 on Top Overlay
0,175.7 to 2790,173.27 on Top Overlay
-84,2984.27 to -179,1400.27 on Top Overlay
-84,2984.27 to 209.47,-9.49 on Top Overlay

## Text inside footprints (layer, text, board x,y; h text height)
C1: Top Overlay "+" at 1120,1954.37 h59.06 r90
C2: Top Overlay "+" at 1224,2341 h59.06 r90
C9: Top Overlay "+" at 2434,2578.27 h59.06 r90
C12: Top Overlay "+" at 2598,2370.27 h59.06 r270
C13: Bottom Overlay "+" at 368,1908 h59.06 r270
C14: Bottom Overlay "+" at 568,2618 h59.06 r90
C17: Bottom Overlay "+" at 924,2619 h59.06 r90
C18: Top Overlay "+" at 785,2017 h59.06
C19: Top Overlay "+" at 401,2036 h59.06 r90
C22: Top Overlay "+" at 369,2322 h59.06 r90
C23: Top Overlay "+" at 1511,1847 h59.06 r270
C24: Top Overlay "+" at 2069,1853 h59.06 r90
C26: Top Overlay "+" at 140,965.63 h59.06 r270